# Altium PCB Mach_In.PcbDoc
Units mm, origin at the board's own origin, x right, y up, seen from the top; angles counter-clockwise.
Board outline 55 x 65 mm, 2 copper layers (Top Layer, Bottom Layer); 28 components, 19 nets, 94 pads, 6 vias.
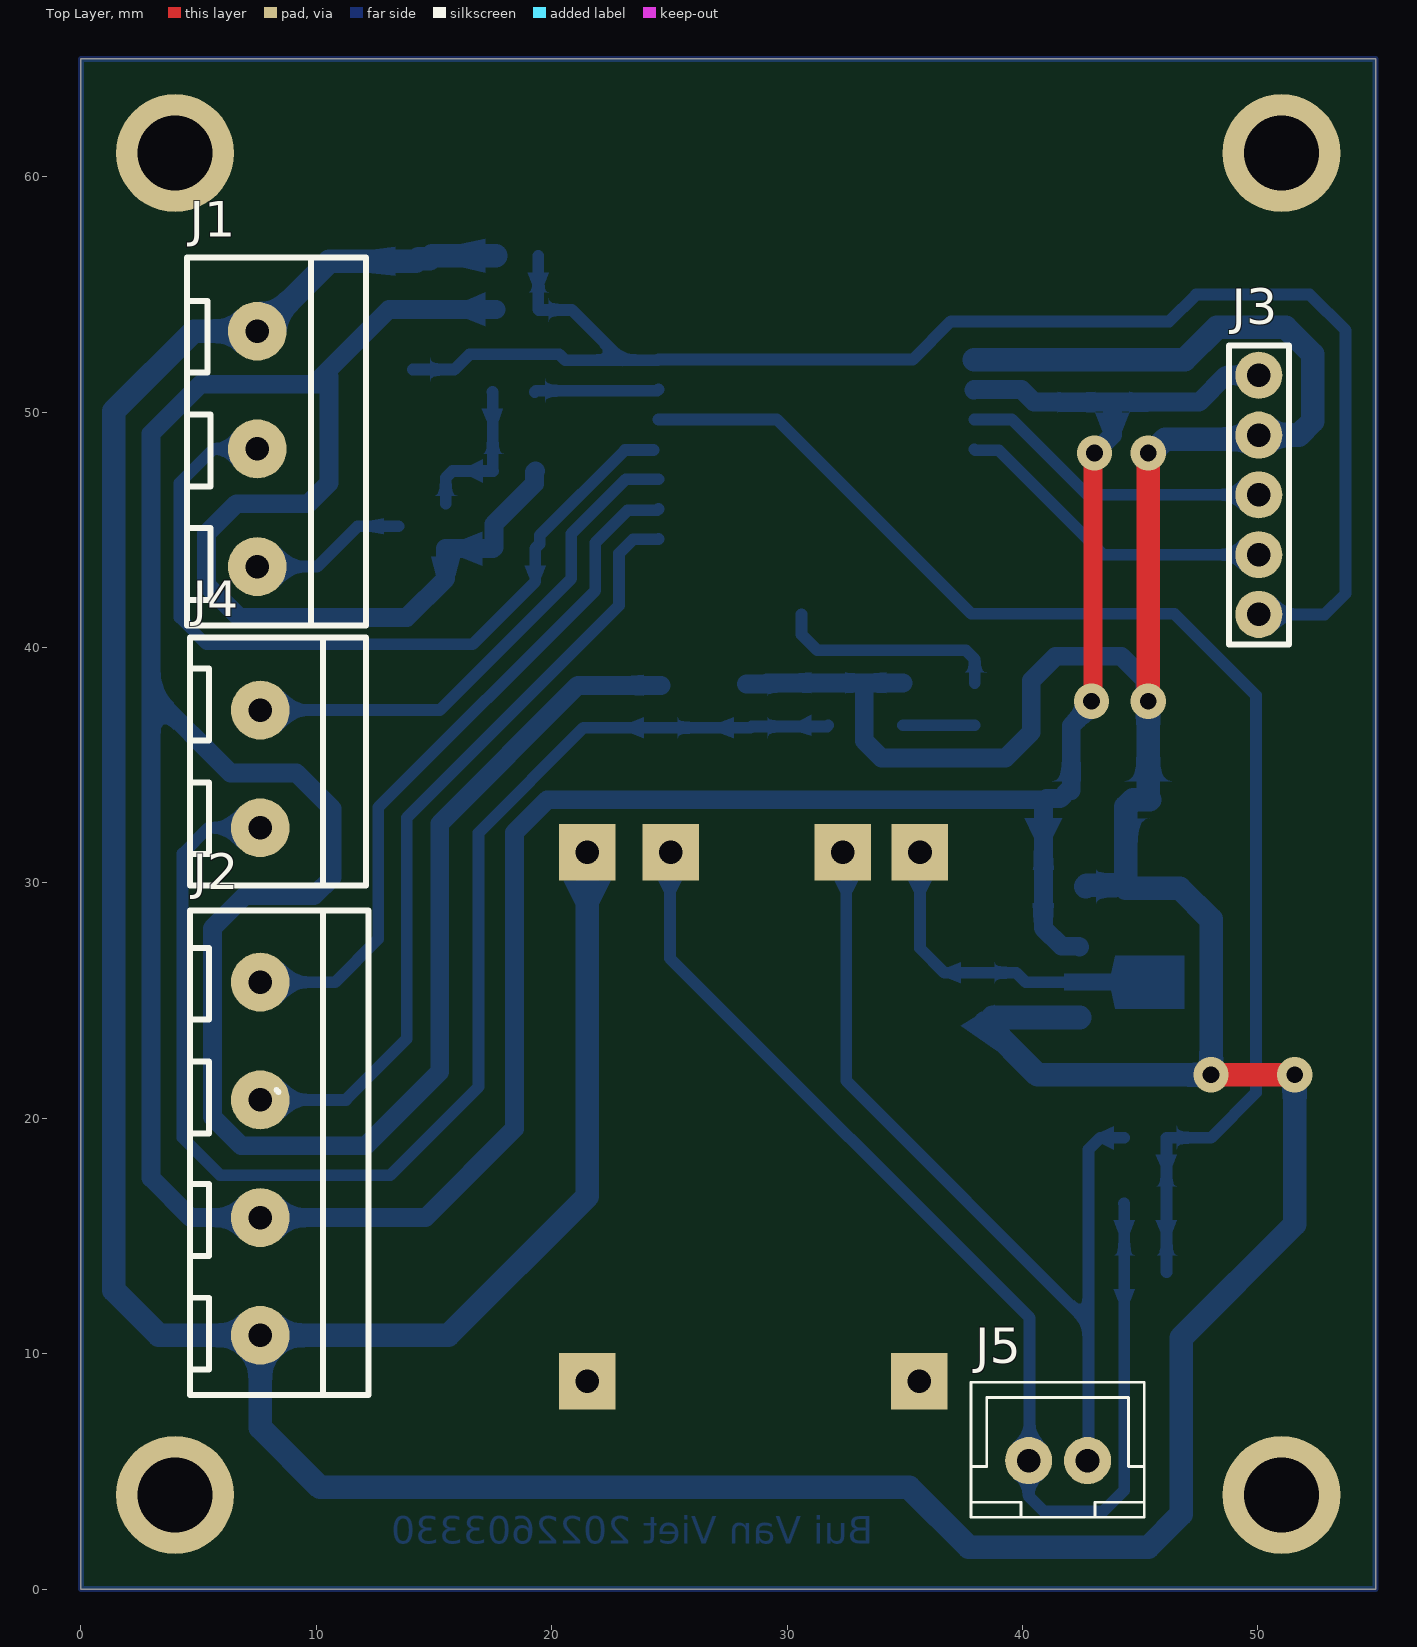
[diagram p0: Top Layer view]
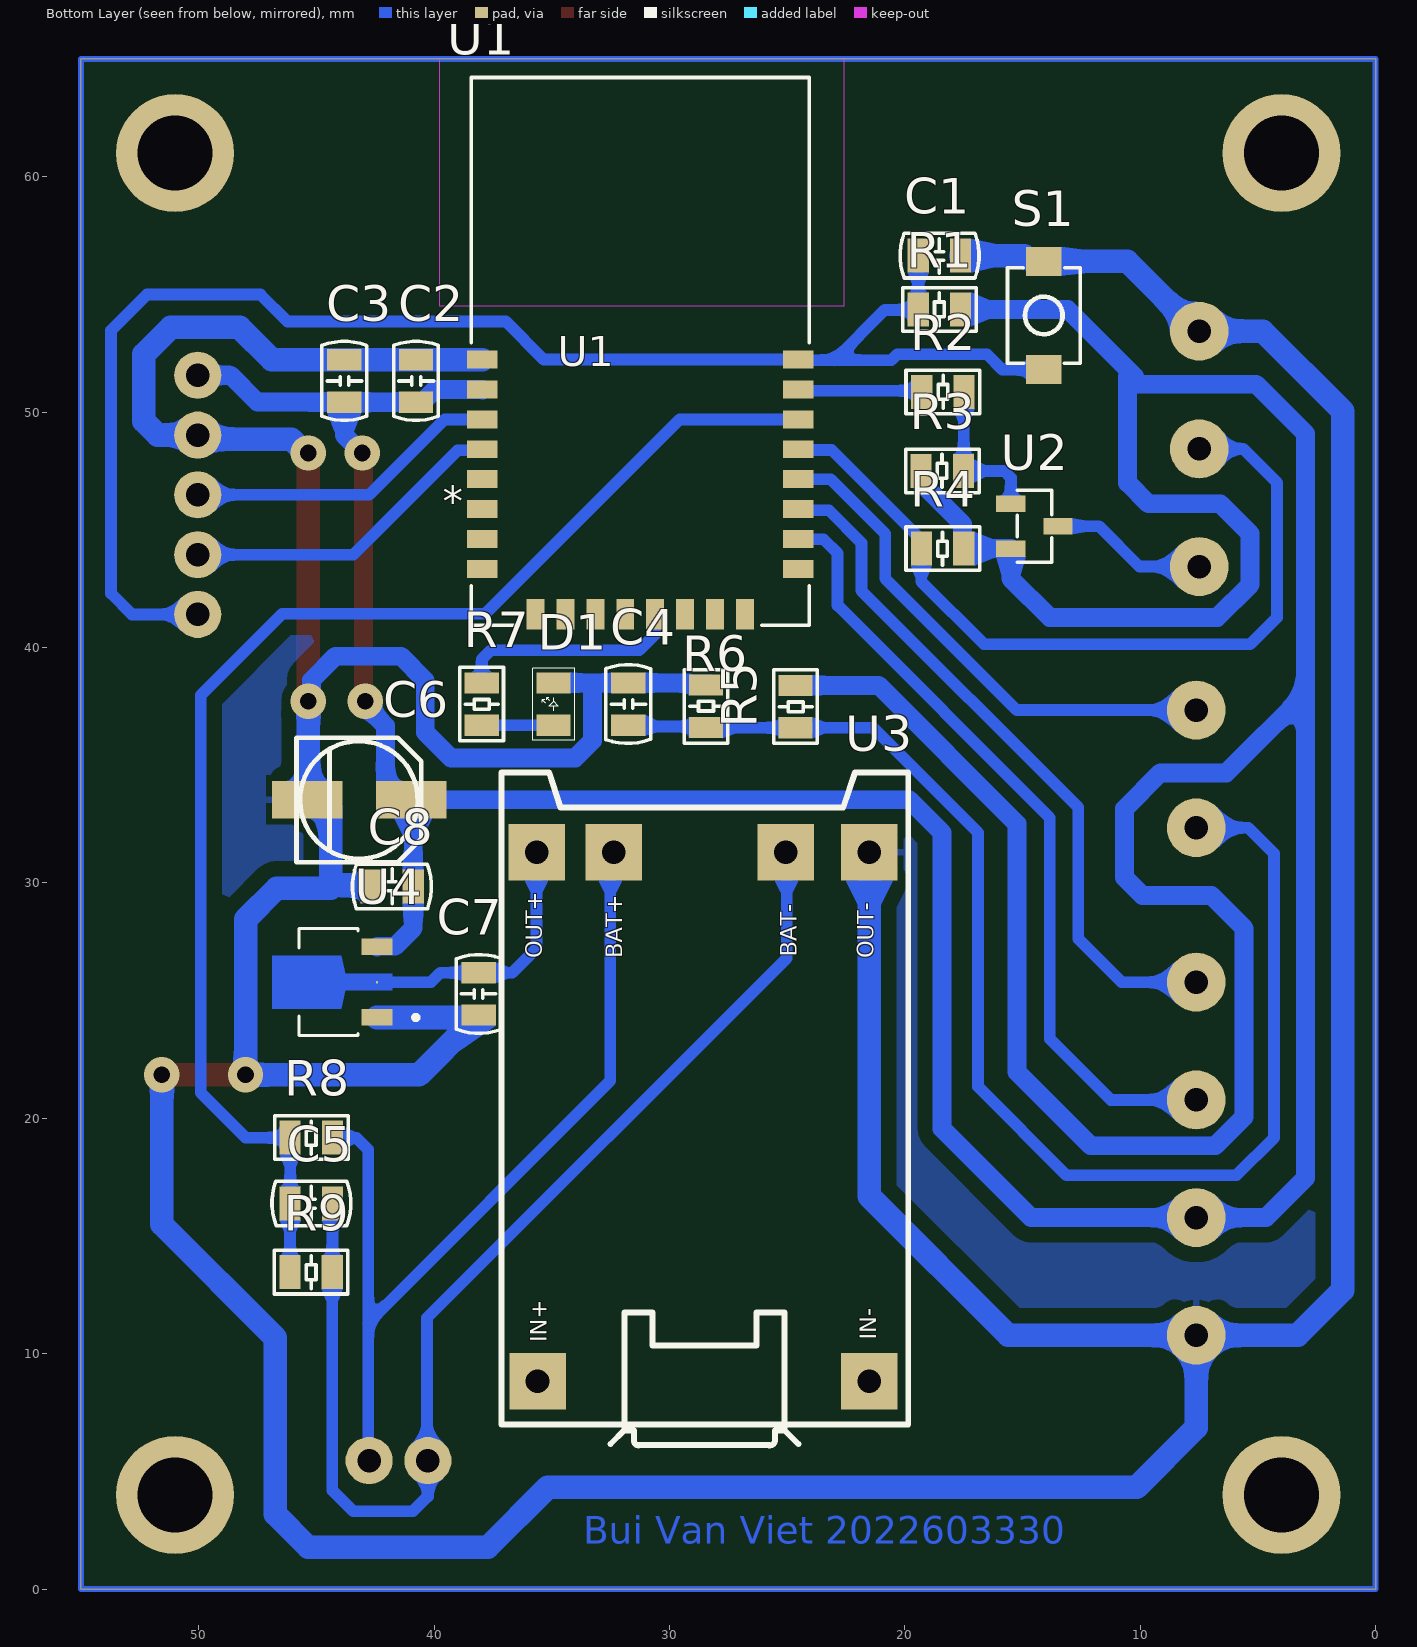
[diagram p1: Bottom Layer view, seen from below]

## Layer stack, top to bottom
Top Solder: solder mask 0.0102, Solder Resist, Dk 3.5
Top Layer: signal copper 0.0356
Dielectric 1: dielectric 0.32, FR-4, Dk 4.8
Bottom Layer: signal copper 0.0356
Bottom Solder: solder mask 0.0102, Solder Resist, Dk 3.5

## Board outline
0,0 0,65 55,65 55,0

## Design rules (kind name [scope] priority, off if disabled: settings)
Clearance [All] p1: gap=0.3 ignorepadtopadclearanceinfootprint=FALSE
PolygonConnect [All] p1: connectstyle=Relief reliefconductorwidth=0.254 reliefentries=4 polygonreliefangle="90 Angle" airgapwidth=0.254
RoutingLayers [All] p1: top layer_v5=FALSE bottom layer_v5=TRUE
RoutingVias [All] p1: holewidth=0.711 width=1.27 viastyle="Through Hole" minholewidth=0.711 minwidth=1.27 maxholewidth=0.711 maxwidth=1.27
SolderMaskExpansion [All] p1: expansion=0.102 istentingtop=FALSE
SupplyNets "Schematic Supply Nets_4" [InNet('PIN -')] p1: voltage=0.000
SupplyNets "Schematic Supply Nets_2" [InNet('PIN +')] p2: voltage=0.000
SupplyNets "Schematic Supply Nets_3" [InNet('VCC_DS18B20')] p3: voltage=0.000
SupplyNets "Schematic Supply Nets_1" [InNet('GND')] p4: voltage=0.000
SupplyNets "Schematic Supply Nets" [InNet('+3.3')] p5: voltage=0.000
Width GND [InNet('GND')] p1: maxlimit=1 minlimit=0.3 preferedwidth=1
Width 3.3V [InNet('+3.3')] p2: maxlimit=0.8 minlimit=0.3 preferedwidth=0.8
Width NET [All] p3: maxlimit=0.5 minlimit=0.3 preferedwidth=0.5
29 further rules are at their usual default settings.

## Components (designator, comment, footprint, x,y, rotation, side; value= is the part's Value field where it differs from the comment)
C1 "100nF" "CAPACITOR 0805" 18.531,56.642 r0 bottom
C2 "100nF" "CAPACITOR 0805" 40.767,51.319 r270 bottom
C3 "10uF" "CAPACITOR 0805" 43.815,51.319 r270 bottom
C4 "100nF" "CAPACITOR 0805" 31.75,37.592 r270 bottom
C5 "100nF" "CAPACITOR 0805" 45.212,16.383 r0 bottom
C6 "100uF/10V" ALUMINUM_5mm 43.18,33.528 r270 bottom
C7 "10uF" "CAPACITOR 0805" 38.1,25.284 r90 bottom
C8 "10uF" "CAPACITOR 0805" 41.783,29.845 r180 bottom
D1 "LED_0805_RED" LED_0805_RED 34.925,37.592 r180 bottom
J1 "DS18B20" BORNE-5.00-3P 8.308,48.751 r180 top
J2 "801S" BORNE-5.00-4P 8.418,18.535 r180 top
J3 "CC DEBUGGER" MALE-2.54-5P 50.038,46.482 r0 top
J4 "SCT 013" BORNE-5.00-2P 8.374,35.158 r180 top
J5 "PIN" JST-2.54-2P 41.489,5.92 r270 top
R1 "RESISTOR_0805" RESISTOR_0805 18.531,54.356 r180 bottom
R2 "220" RESISTOR_0805 18.382,50.855 r0 bottom
R3 "10K" RESISTOR_0805 18.415,47.498 r180 bottom
R4 "10K" RESISTOR_0805 18.395,44.196 r180 bottom
R5 "10K" RESISTOR_0805 24.638,37.485 r90 bottom
R6 "10K" RESISTOR_0805 28.448,37.498 r270 bottom
R7 "220" RESISTOR_0805 37.973,37.592 r90 bottom
R8 "10K" RESISTOR_0805 45.212,19.177 r180 bottom
R9 "10K" RESISTOR_0805 45.223,13.462 r0 bottom
S1 "PUSH_BUTTON_SMD_3X4X2" PUSH_BUTTON_SMD_3X4X2 14.097,54.102 r270 bottom
U1 "E18-MS1-PCB" E18-MS1-PCB_BYT 31.242,52.578 r180 bottom
U2 "AP3P080N" SOT23-3 14.494,45.151 r0 bottom
U3 "TP4056_6PINS" TP4056_6PINs 28.575,20.066 r0 bottom
U4 "HT7333" IC_HT7333 44.323,25.781 r90 bottom

## Footprints (in the part's own frame and the unit in brackets; to place one, negate y for a bottom-side part, rotate by r counter-clockwise, add the part's x,y. Pads: shape width x height; smd on the part's side, far side on the other; paste and mask are expansions set on the pad)
ALUMINUM_5mm [mm] "ALUMINUM CAPACITOR 5mm"
  rect 1.6x3 smd: 1(0,2.213) 2(0,-2.213)
  silkscreen extent -2.64,-2.66 2.66,2.64, body extent -2.67,-2.99 2.63,3.01, height 5.81
BORNE-5.00-2P [mm]
  round 2.5 hole 1: 1(0.754,2.821) 2(0.754,-2.18)
  silkscreen extent -3.75,-5.27 3.75,5.27, body extent -3.86,-5.28 3.74,5.32, height 10.1
BORNE-5.00-3P [mm]
  round 2.5 hole 1: 1(0.815,5.317) 2(0.815,0.317) 3(0.815,-4.683)
  silkscreen extent -3.8,-7.81 3.8,7.81, body extent -3.8,-7.79 3.8,7.81, height 10.1
BORNE-5.00-4P [mm]
  round 2.5 hole 1: 1(0.798,7.754) 2(0.798,2.754) 3(0.798,-2.246) 4(0.798,-7.246)
  silkscreen extent -3.79,-10.29 3.79,10.29, body extent -3.8,-10.3 3.8,10.33, height 10
"CAPACITOR 0805" [mm]
  rect 0.9x1.45 smd: 1(-0.9,0) 2(0.9,0)
  silkscreen extent -1.68,-0.95 1.67,0.95, body extent -1.03,-0.62 0.97,0.63, height 0.61
E18-MS1-PCB_BYT [mil]
  rect 51x30 smd paste+0 mask+0: 1(-264,-13.78) 2(-264,-63.78) 3(-264,-113.78) 4(-264,-163.78) 5(-264,-213.78) 6(-264,-263.78) 7(-264,-313.78) 8(-264,-363.78) 17(264,-363.78) 18(264,-313.78) 19(264,-263.78) 20(264,-213.78) 21(264,-163.78) 22(264,-113.78) 23(264,-63.78) 24(264,-13.78)
  rect 30x51 smd paste+0 mask+0: 9(-175,-439.5) 10(-125,-439.5) 11(-75,-439.5) 12(-25,-439.5) 13(25,-439.5) 14(75,-439.5) 15(125,-439.5) 16(175,-439.5)
  silkscreen extent -283,-458 283,458, body extent -280,-455 280,453, height 94
IC_HT7333 [mm]
  rect 0.7x1.3 smd: 1(-1.5,-1.9) 3(1.5,-1.9)
  rect 0.1x0.1 smd paste-1 mask+0: 2(0,-1.9)
  Top Layer region: 1.125,-0.375 0.35,-0.56 0.35,-2.55 -0.35,-2.55 -0.35,-0.56 -1.125,-0.375 -1.125,2.55 1.125,2.55
  silkscreen extent -2.27,-3.65 2.27,1.41, body extent -2.25,-1.88 2.25,2.21, height 1.6
JST-2.54-2P [mm]
  round 2 hole 1: 1(0.459,1.27) 2(0.459,-1.23)
  silkscreen extent -2.87,-3.68 2.87,3.68, body extent -2.87,-3.68 2.88,3.72, height 7.05
LED_0805_RED [mm]
  rect 1.45x0.9 smd: 1(0,-0.9) 2(0,0.9)
  silkscreen extent -0.89,-1.53 0.9,1.52, body extent -0.62,-1.02 0.63,0.98, height 1.1
MALE-2.54-5P [mm]
  round 2 hole 1: 1(0,-5.08) 2(0,-2.54) 3(0,0) 4(0,2.54) 5(0,5.08)
  silkscreen extent -1.27,-6.35 1.27,6.34, body extent -1.33,-6.36 1.21,6.34, height 8.89
PUSH_BUTTON_SMD_3X4X2 [mm]
  rect 1.23x1.5 smd: 1(-2.3,0) 2(2.3,0)
  silkscreen extent -2.03,-1.54 2.03,1.54, body extent -2.49,-1.45 2.51,1.45, height 2
RESISTOR_0805 [mm]
  rect 0.9x1.45 smd: 1(-0.9,0) 2(0.9,0)
  silkscreen extent -1.56,-0.93 1.57,0.93, body extent -0.98,-0.64 1.02,0.61, height 0.46
SOT23-3 [mm]
  rect 1.25x0.7 smd paste+0 mask+0.051: D(-1,0) G(1,-0.95) S(1,0.95)
  silkscreen extent -0.73,-1.53 0.73,1.53, body extent -1.25,-1.5 1.25,1.5, height 1.1
TP4056_6PINs [mm] "MODULE BATTERY CHARGER 6 PINS"
  rect 2.4x2.4 hole 1: 1(-7.068,-11.229) 2(-3.514,-11.229) 3(3.787,-11.229) 4(7.068,-11.229) 5(7.029,11.229) 6(-7.068,11.229)
  silkscreen extent -8.72,-14.63 8.55,13.96, body extent -8.68,-14.59 8.52,13.96, height 4.22

## Part data
C1 C2 C3 C4 C5 C7 C8: library part "CAPACITOR 0805", "Generic Capacitor 0805, 2x1.25x1.4mm."
C6: "Aluminum Capacitor 100uF/10V 5mm"
D1: "LED 0805 Red.", JLCPCB PN=C113551
J1: library part BORNE-5.00-3P, "Borne 3 Vias, Pitch 5mm.", JLCPCB PN=C91154
J2: library part BORNE-5.00-4P, "Borne 4 Vias, Pitch 5mm.", JLCPCB PN=C2915641
J3: library part MALE-2.54-5P, "Male Header Connector 2.54mm 5 Pins.", JLCPCB PN=C492404
J4: library part BORNE-5.00-2P, "Borne 2 Vias, Pitch 5mm.", JLCPCB PN=C91153
J5: library part JST-2.54-2P, "Female Connector JST 2 Vias, 2.54mm."
R1: "Generic Resistor 0805."
R2 R3 R4 R5 R6 R7 R8 R9: library part RESISTOR_0805, "Generic Resistor 0805."
S1: "Push Button Tactile Switch SMD 2 Pins 3x4x2mm.", JLCPCB PN=C231644
U1: "No Description Available", Manufacturer_Name="Chengdu Ebyte Elec Tech", Copyright="Copyright (C) 2026 Ultra Librarian. All rights reserved.", Manufacturer_Part_Number=E18-MS1-PCB, RefDes=RefDes, Type=Type
U2: "Mosfet PNP"
U3: "MODULE BATTERY CHARGER 6 PINS"
U4: "Three-terminal, low power, high voltage regulator implemented in CMOS technology", Package=None, Check_prices=https://www.snapeda.com/parts/HT7333/Holtek/view-part/?ref=eda, MF="Holtek Semiconductor", MP=HT7333, SnapEDA_Link=https://www.snapeda.com/parts/HT7333/Holtek/view-part/?ref=snap

## Free pads (board coordinates)
  round 5 hole 3.2: 2(4,4) 2(4,61) 2(51,4) 2(51,61)

## Via types
v1: diameter 1.5, hole 0.711, Top Layer to Bottom Layer, 6 vias

## Nets (pads, with @x,y where several pads share a name; then routed paths per layer and width w, separated by ;. In a path a pad name is that pad's centre, name@x,y a point inside that pad or via, vN(x,y) a via of type N, cw(c..) or ccw(c..) an arc to the next point about the centre after c; other vN are vias at no path point)
+3.3: C2.2 C3.2 C6.1 C8.2 J2.2 J3.5 R1.2 R3.1 R4.2 R5.2 U1.2 U2.S U4.3 | length 232.6
  Top Layer w0.8: v1(42.926,37.719) 42.989,37.782 42.989,48.197 v1(43.053,48.26)
  Bottom Layer w0.8: 10.234,51.181 5.08,51.181 2.978,49.079 2.978,38.043 ; R1.2 13.081,54.356 10.234,51.509 10.541,51.509 10.541,46.99 9.652,46.101 6.604,46.101 5.334,44.831 5.334,42.672 6.731,41.275 13.843,41.275 15.494,42.926 U2.S 15.496,44.198 17.493,44.198 R4.2 17.545,44.246 17.545,45.231 19.265,46.951 19.265,47.448 R3.1 ; R5.2 21.113,38.385 15.24,32.512 15.24,21.971 12.1,18.831 6.812,18.831 5.588,20.055 5.588,28.067 6.985,29.464 9.906,29.464 10.668,30.226 10.668,33.147 9.144,34.671 6.35,34.671 2.978,38.043 ; U1.2@37.929,50.939 U1.2 39.953,50.958 40.492,50.419 C2.2 C3.2 ; C6.1@40.883,33.528 19.812,33.528 18.415,32.131 18.415,19.558 14.638,15.781 J2.2 4.666,15.781 2.978,17.469 2.978,38.043 ; U4.3 42.399,27.305 41.656,27.305 40.883,28.078 C8.2 40.883,33.444 41.021,33.582 41.593,33.582 41.939,33.928 42.067,33.928 42.067,36.671 42.926,37.53 v1(42.926,37.719) ; v1(43.053,48.26) 43.815,49.022 C3.2 ; J3.5 48.641,51.562 47.498,50.419 C3.2
DC: J3.3 U1.3 | length 13.4
  Bottom Layer w0.5: U1.3 39.545,49.688 42.751,46.482 J3.3
DD: J3.2 U1.4 | length 13.9
  Bottom Layer w0.5: U1.4 37.987,48.379 38.997,48.379 43.434,43.942 J3.2
DL_PIN: C5.2 R8.1 R9.2 U1.22 | length 57.4
  Bottom Layer w0.5: U1.22 29.56,49.688 37.816,41.432 46.452,41.432 49.911,37.973 49.911,21.082 48.006,19.177 R8.1 C5.2 46.118,16.378 46.118,13.467 R9.2
DONG: J4.2 U1.20 | length 22.9
  Bottom Layer w0.5: J4.2@6.854,37.338 15.24,37.338 20.828,42.926 20.828,44.831 23.145,47.148 U1.20
GND: C1.1 C2.1 C3.1 C4.1 C6.2 C7.1 C8.1 D1.2 J1.3 J2.1 J3.4 R6.1 S1.1 U1.1 U3.1 U4.1 | length 261.4
  Top Layer w1: v1(45.339,37.719) v1(45.339,48.26) ; v1(48.006,21.844) v1(51.562,21.844)
  Bottom Layer w0.8: R6.1@28.28,38.448 29.107,38.448 29.151,38.492 C4.1 33.275,38.492 ; D1.2 33.275,38.492 ; v1(45.339,37.719) 45.205,37.853 45.205,38.609 44.19,39.624 41.402,39.624 40.372,38.594 40.372,36.395 39.282,35.306 34.005,35.306 33.275,36.036 33.275,38.492
  Bottom Layer w1: C1.1 14.933,56.642 14.808,56.517 14.347,56.517 14.232,56.402 S1.1 10.555,56.402 7.587,53.434 J1.3 4.793,53.434 1.397,50.038 1.397,12.7 3.316,10.781 J2.1 ; U3.1 21.507,16.681 15.607,10.781 J2.1 ; U1.1 37.952,52.223 C2.1@40.763,52.223 ; C7.1@38.419,24.065 40.64,21.844 v1(48.006,21.844) 48.006,28.448 46.679,29.775 44.393,29.775 44.393,33.228 44.693,33.528 C6.2 45.339,33.582 v1(45.339,37.719) ; C7.1@38.742,24.281 U4.1 ; C2.1 C3.1 46.885,52.219 48.26,53.594 51.181,53.594 52.324,52.451 52.324,49.608 51.738,49.022 J3.4 49.866,48.85 46.064,48.85 45.474,48.26 v1(45.339,48.26) ; C8.1 42.733,29.895 42.733,29.899 43.996,29.899 ; v1@51.562,21.771 51.562,15.494 46.736,10.668 46.736,3.175 45.339,1.778 37.719,1.778 35.179,4.318 10.16,4.318 7.62,6.858 J2.1
LED: R7.2 U1.13 | length 9.7
  Bottom Layer w0.5: U1.13 30.607,40.552 31.281,39.878 37.592,39.878 37.973,39.497 R7.2
"MD RUNG": J2.4 U1.19 | length 29.7
  Bottom Layer w0.5: J2.4 10.795,25.781 12.634,27.62 12.634,33.208 21.844,42.418 21.844,44.45 23.222,45.828 24.487,45.828 U1.19
NetC4_2: C4.2 J4.1 R5.1 R6.2 | length 58.2
  Bottom Layer w0.5: J4.1 5.414,32.338 4.318,31.242 4.318,19.177 5.914,17.581 13.136,17.581 16.891,21.336 16.891,32.131 21.345,36.585 R5.1 24.645,36.592 28.441,36.592 R6.2 28.495,36.645 31.703,36.645 C4.2
NetD1_1: D1.1 R7.1 | length 3
  Bottom Layer w0.5: D1.1 R7.1
NetR2_1: R2.1 R3.2 U2.G | length 6.6
  Bottom Layer w0.5: U2.G 15.494,47.205 15.787,47.498 R3.2 17.498,47.515 17.498,50.838 R2.1
NHIET: J1.2 R4.1 U1.21 | length 34.7
  Bottom Layer w0.5: J1.2 5.635,48.434 4.191,46.99 4.191,41.275 5.334,40.132 16.637,40.132 19.304,42.799 19.304,44.205 19.495,44.396 19.495,44.768 23.114,48.387 U1.21@24.319,48.387
"ON/OFF DS18B20": R2.2 U1.23 | length 5.3
  Bottom Layer w0.5: R2.2 19.333,50.906 24.485,50.906 U1.23
"OUT +": C7.2 U3.4 U4.2 | length 10.8
  Bottom Layer w0.5: U3.4 35.643,27.222 36.681,26.184 39.729,26.184 40.132,25.781 41.773,25.781
"PIN +": J5.1 R8.2 U3.3 | length 39.3
  Bottom Layer w0.5: U3.3@32.512,31.295 32.512,21.59 42.799,11.303 ; J5.1@42.822,5.397 J5.1 42.799,5.501 42.799,11.303 ; R8.2@44.315,19.169 43.299,19.169 42.799,18.669 42.799,11.303
"PIN -": C5.1 J5.2 R9.1 U3.2 | length 50.6
  Bottom Layer w0.5: U3.2@25.019,31.295 25.019,26.797 40.299,11.517 40.299,5.501 J5.2 40.259,3.937 40.894,3.302 43.434,3.302 44.323,4.191 R9.1 44.318,13.467 44.318,16.378 C5.1
RESET: C1.2 J3.1 R1.1 S1.2 U1.24 | length 63.8
  Bottom Layer w0.5: S1.2 15.861,51.802 16.51,52.451 20.32,52.451 20.574,52.197 22.987,52.197 ; C1.2 R1.1 19.449,54.338 20.846,54.338 22.987,52.197 ; J3.1 52.832,41.402 53.721,42.291 53.721,53.467 52.197,54.991 47.371,54.991 46.228,53.848 36.957,53.848 35.337,52.228 U1.24 24.505,52.197 22.987,52.197
RUNG: J2.3 U1.18 | length 33.6
  Bottom Layer w0.5: J2.3 11.256,20.781 13.843,23.368 13.843,32.766 22.86,41.783 22.86,44.004 23.456,44.6 24.528,44.6 U1.18
VCC_DS18B20: J1.1 U2.D | length 6.7
  Bottom Layer w0.5: J1.1 10.033,43.434 11.75,45.151 U2.D
pads on no net: U1.5 U1.6 U1.7 U1.8 U1.9 U1.10 U1.11 U1.12 U1.14 U1.15 U1.16 U1.17 U3.5 U3.6
copper on no net: | length 240
  Bottom Layer w0.254: 0,0 55,0 55,65 0,65 0,0

## Polygon pours and split planes (outlines as drawn)
GND on Bottom Layer "GND_L02_P000" (solid, remove dead copper, pour order 0): 0,65 55,65 55,0 54.737,0 54.483,0 0,0

## Keep-outs
Bottom Layer:
  rectangle: 22.606,54.483 39.751,65.024

## Other copper
Bottom Layer:
  text "Bui Van Viet 2022603330" at 33.655,1.548 h2

## Text inside footprints (layer, text, board x,y; h text height)
U1: Mechanical 13 "*" at 36.982,51.593 h1.27; Bottom Overlay "*" at 39.624,45.593 h1.27
U3: Bottom Overlay "BAT+" at 32.009,26.795 h0.7 r270; Bottom Overlay "BAT-" at 24.594,26.858 h0.7 r270; Bottom Overlay "OUT-" at 21.312,26.795 h0.7 r270; Bottom Overlay "IN-" at 21.212,10.595 h0.7 r270; Bottom Overlay "OUT+" at 35.409,26.795 h0.7 r270; Bottom Overlay "IN+" at 35.212,10.495 h0.7 r270